# EAGLE board RPI.v5_PCM5122brd (EAGLE 8.4.3)
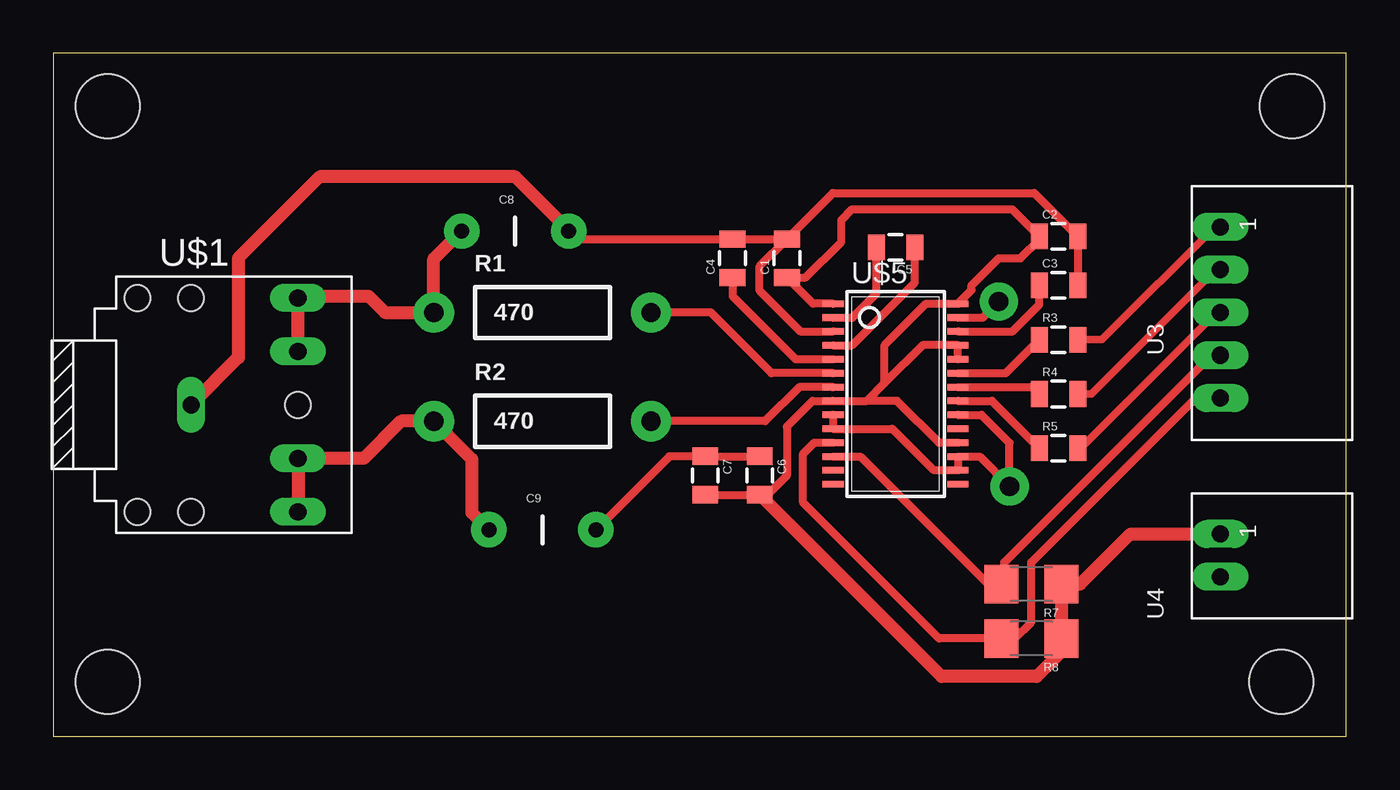
[diagram p0: board, top side]
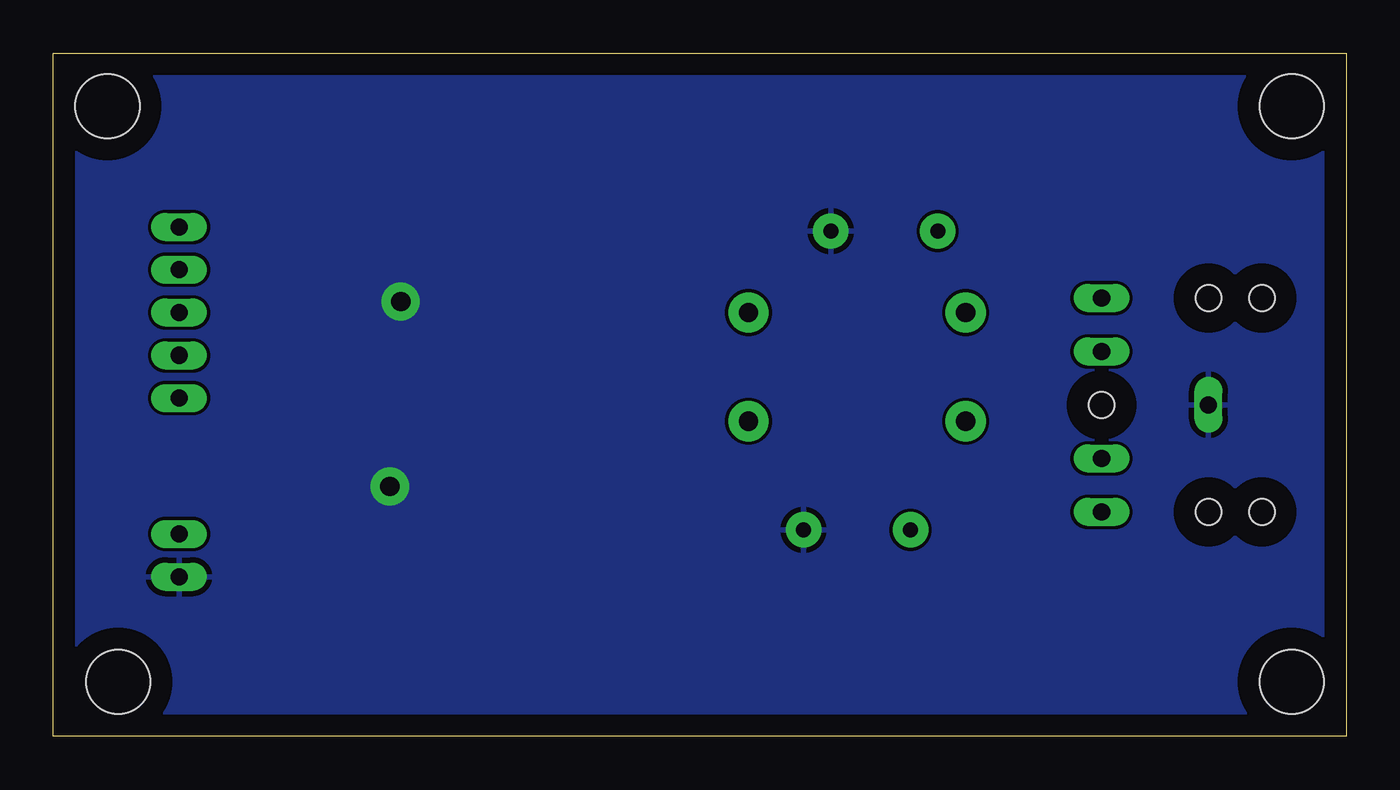
[diagram p1: board, bottom side, seen from below]

Size 60.43 x 31.93 mm. Coordinates in mm from the lower left corner, seen from the top.
Outline: 0,0 60.43,0 60.43,31.93 0,31.93 0,0
Copper layers (1*16): Top 0.035mm / dielectric 1.5mm / Bottom 0.035mm
Design rules "default": minimum track width 6mil, minimum drill 0.35mm, track to track 6mil, track to pad 6mil, pad to pad 6mil, via to via 6mil, smd to smd 6mil, copper to edge 40mil, drill to drill 6mil, minimum pad ring 10mil, minimum via ring 8mil, stop-mask expansion 4mil, vias tented up to drill 0mil, thermal gap 10mil
Net classes: 0 default: width 0.356 mm
Holes 3 mm at 2.54,29.46 57.91,29.46 2.54,2.54 57.4,2.54

## Footprints (pad centres in the part's own frame; a part is rotated, then mirrored left to right if it is on the bottom)
0805 = smd 0.8 x 1.2: 1 -0.9,0; 2 0.9,0
CAP-PTH-5MM = drill 0.7 pad 1.651: 1 -2.5,0; 2 2.5,0
AXIAL-0.4 = drill 0.9 pad 1.88: P$1 -5.08,0; P$2 5.08,0
1206 = smd 1.6 x 1.8: 1 -1.4,0; 2 1.4,0
JST_B5B-PH_HEADER = drill 0.8 long: P1 4,0.048; P2 2,0.048; P3 0,0.048; P4 -2,0.048; P5 -4,0.048
JST_B2B-PH_HEADER = drill 0.8 long: P1 1.075,0.048; P2 -0.925,0.048
FC68131-5P = drill 0.8 long: 1 -5,0; 2 0,-5; 3 0,-2.5; 4 0,2.5; 5 0,5 | hole 1.2: 0,0; -5,-5; -5,5; -7.5,5; -7.5,-5
TSSOP28 = smd 0.305 x 0.991: 1 -4.225,-2.918; 2 -3.575,-2.918; 3 -2.925,-2.918; 4 -2.275,-2.918; 5 -1.625,-2.918; 6 -0.975,-2.918; 7 -0.325,-2.918; 8 0.325,-2.918; 9 0.975,-2.918; 10 1.625,-2.918; 11 2.275,-2.918; 12 2.925,-2.918; 13 3.575,-2.918; 14 4.225,-2.918; 15 4.225,2.918; 16 3.575,2.918; 17 2.925,2.918; 18 2.275,2.918; 19 1.625,2.918; 20 0.975,2.918; 21 0.325,2.918; 22 -0.325,2.918; 23 -0.975,2.918; 24 -1.625,2.918; 25 -2.275,2.918; 26 -2.925,2.918; 27 -3.575,2.918; 28 -4.225,2.918

## Placement (x,y rotation side)
C1  0.1uF  [0805]  34.29,22.35 90 top
C2  0.1uF  [0805]  46.99,23.37 0 top
C3  0.1uF  [0805]  46.99,21.08 0 top
C4  2.2uF  [0805]  31.75,22.35 90 top
C5  2.2uF  [0805]  39.37,22.86 180 top
C6  0.1uF  [0805]  33.02,12.19 270 top
C7  10uF  [0805]  30.48,12.19 270 top
C8  2.2nF  [CAP-PTH-5MM]  21.59,23.62 0 top
C9  2.2nF  [CAP-PTH-5MM]  22.86,9.65 0 top
R1  470  [AXIAL-0.4]  22.86,19.81 0 top
R2  470  [AXIAL-0.4]  22.86,14.73 0 top
R3  1K  [0805]  46.99,18.54 0 top
R4  1K  [0805]  46.99,16 0 top
R5  1K  [0805]  46.99,13.46 0 top
R7  10k  [1206]  45.72,7.11 180 top
R8  10k  [1206]  45.72,4.57 180 top
U3  I2S AND I2C  [JST_B5B-PH_HEADER]  54.61,19.81 90 top
U4  PWR  [JST_B2B-PH_HEADER]  54.61,8.38 90 top
U$1  FC68131  [FC68131-5P]  11.43,15.49 0 top
U$5  PCM5122  [TSSOP28]  39.37,16 270 top

## Library data of the parts
C1-C9 = SparkFun-Capacitors
R1-R5 R7 R8 = SparkFun-Resistors
U3 U4 = SRG
U$1 = con-cliff
U$5 = ref-packages

## Nets
3.3V: C1.1 C2.1 C6.2 C7.2 R7.1 R8.1 U4.P1 U$5.1 U$5.8 U$5.18 U$5.24 U$5.25 U$5.28
BCK: R5.2 U3.P3
DIN: R4.2 U3.P2
GND: C1.2 C2.2 C3.2 C4.2 C6.1 C7.1 C8.2 C9.2 U4.P2 U$1.1 U$5.3 U$5.9 U$5.10 U$5.16 U$5.17 U$5.20 U$5.27
LRCK: R3.2 U3.P1
N$1: C3.1 U$5.26
N$2: C5.2 U$5.2
N$3: C5.1 U$5.4
N$4: C4.1 U$5.5
N$5: C9.1 R2.P$1 U$1.2 U$1.3
N$6: C8.1 R1.P$1 U$1.4 U$1.5
N$7: R1.P$2 U$5.6
N$8: R2.P$2 U$5.7
N$9: R3.1 U$5.23
N$10: R4.1 U$5.22
N$11: R5.1 U$5.21
SCL: R7.2 U3.P4 U$5.12
SDA: R8.2 U3.P5 U$5.11

## Tracks (layer width: path | path; a pad name or v marks a point on that pad's centre or on a via)
3.3V
  Top 0.356: 47.24,4.57 R8.1 46.99,4.57 | 47.24,7.11 R7.1 | 30.48,11.43 C7.2 | 33.02,11.43 C6.2
  Top 0.381: C7.2 C6.2 33.08,11.23 33.33,11.23 34.29,12.19 34.29,14.48 35.49,15.68 U$5.8 38.03,15.68 | 47.12,4.7 47.24,4.57 | 38.86,16.51 38.86,18.29 40.8,20.23 U$5.28 42.93,20.86 42.93,21.08 44.2,22.35 45.21,22.35 46.09,23.23 C2.1 44.82,24.64 37.34,24.64 36.83,24.13 36.83,23.11 35.17,21.45 C1.1 35.52,20.23 U$5.1 | 38.03,15.68 38.86,16.51 | U$5.24 U$5.25 42.28,18.29 40.64,18.29 38.86,16.51 | 38.03,15.68 39.44,15.68 41.39,13.73 U$5.18
  Top 0.61: U4.P1 50.35,9.46 48.01,7.11 R7.1 47.12,4.7 | R8.1 47.12,3.94 45.97,2.79 41.52,2.79 33.08,11.23
BCK
  Top 0.356: R5.2 48.01,13.46 54.36,19.81 U3.P3
DIN
  Top 0.356: R4.2 48.51,16 54.36,21.84 U3.P2
GND  (via drill 0.9 pad 1.78)
  Top 0.356: C7.1 30.48,13.21 | C6.1 33.02,13.21 | 23.88,23.62 C8.2 24.13,23.62 24.38,23.37 | 31.75,23.37 C4.2 | 47.75,23.37 C2.2 | 34.29,23.37 C1.2
  Top 0.381: U$5.3 34.92,18.93 33.02,20.83 33.02,21.98 C1.2 | C1.2 C4.2 24.46,23.25 C8.2 | C9.2 28.8,13.09 C7.1 C6.1 | C1.2 36.44,25.4 45.86,25.4 C2.2 C3.2 | U$5.27 43.45,19.58 v44.2,20.32 | U$5.20 43.39,15.03 44.7,13.72 v44.7,11.68 43.31,13.08 U$5.17 U$5.16 41.17,12.43 39.22,14.38 U$5.10 U$5.9
  Top 0.61: C8.2 24.09,23.66 21.59,26.16 12.45,26.16 8.64,22.35 8.64,17.7 U$1.1
  pour Bottom: 0,0 60.45,0 60.45,32 0,32
LRCK
  Top 0.356: R3.2 49.02,18.54 54.36,23.88 U3.P1
N$1
  Top 0.381: U$5.26 44.84,18.93 46.09,20.18 C3.1
N$2
  Top 0.381: U$5.2 37.36,19.58 38.47,20.69 C5.2
N$3
  Top 0.381: U$5.4 37.33,18.28 40.27,21.22 C5.1
N$4
  Top 0.381: C4.1 31.75,20.57 34.7,17.63 U$5.5
N$5
  Top 0.356: C9.1 20.32,9.65
  Top 0.61: C9.1 19.56,10.45 19.56,12.95 R2.P$1 16.26,14.73 14.52,12.99 U$1.3 U$1.2
N$6
  Top 0.356: 19.05,23.62 C8.1
  Top 0.61: C8.1 17.78,22.31 R1.P$1 15.49,19.81 14.73,20.57 11.51,20.57 U$1.5 U$1.4
N$7
  Top 0.381: U$5.6 33.57,16.98 30.73,19.81 R1.P$2
N$8
  Top 0.381: U$5.7 34.87,16.33 33.27,14.73 R2.P$2
N$9
  Top 0.381: U$5.23 44.53,16.98 R3.1
N$10
  Top 0.381: U$5.22 45.77,16.33 R4.1
N$11
  Top 0.381: U$5.21 43.88,15.68 R5.1
SCL
  Top 0.381: U3.P4 54.13,17.81 44.45,8.13 44.45,7.24 R7.2 43.69,7.11 37.72,13.08 U$5.12
SDA
  Top 0.381: U3.P5 53.4,15.81 45.72,8.13 45.72,5.33 44.96,4.57 R8.2 41.4,4.57 35.05,10.92 35.05,13.21 35.57,13.73 U$5.11